# Altium PCB PCB_HidroExtra_v1.0.PcbDoc
Units mil, origin at the board's own origin, x right, y up, seen from the top; angles counter-clockwise.
Board outline 3149.61 x 3937.01 mil, 2 copper layers (Top Layer, Bottom Layer); 85 components, 51 nets, 234 pads, 10 vias.
Unrouted connection lines stored in the file: 1.
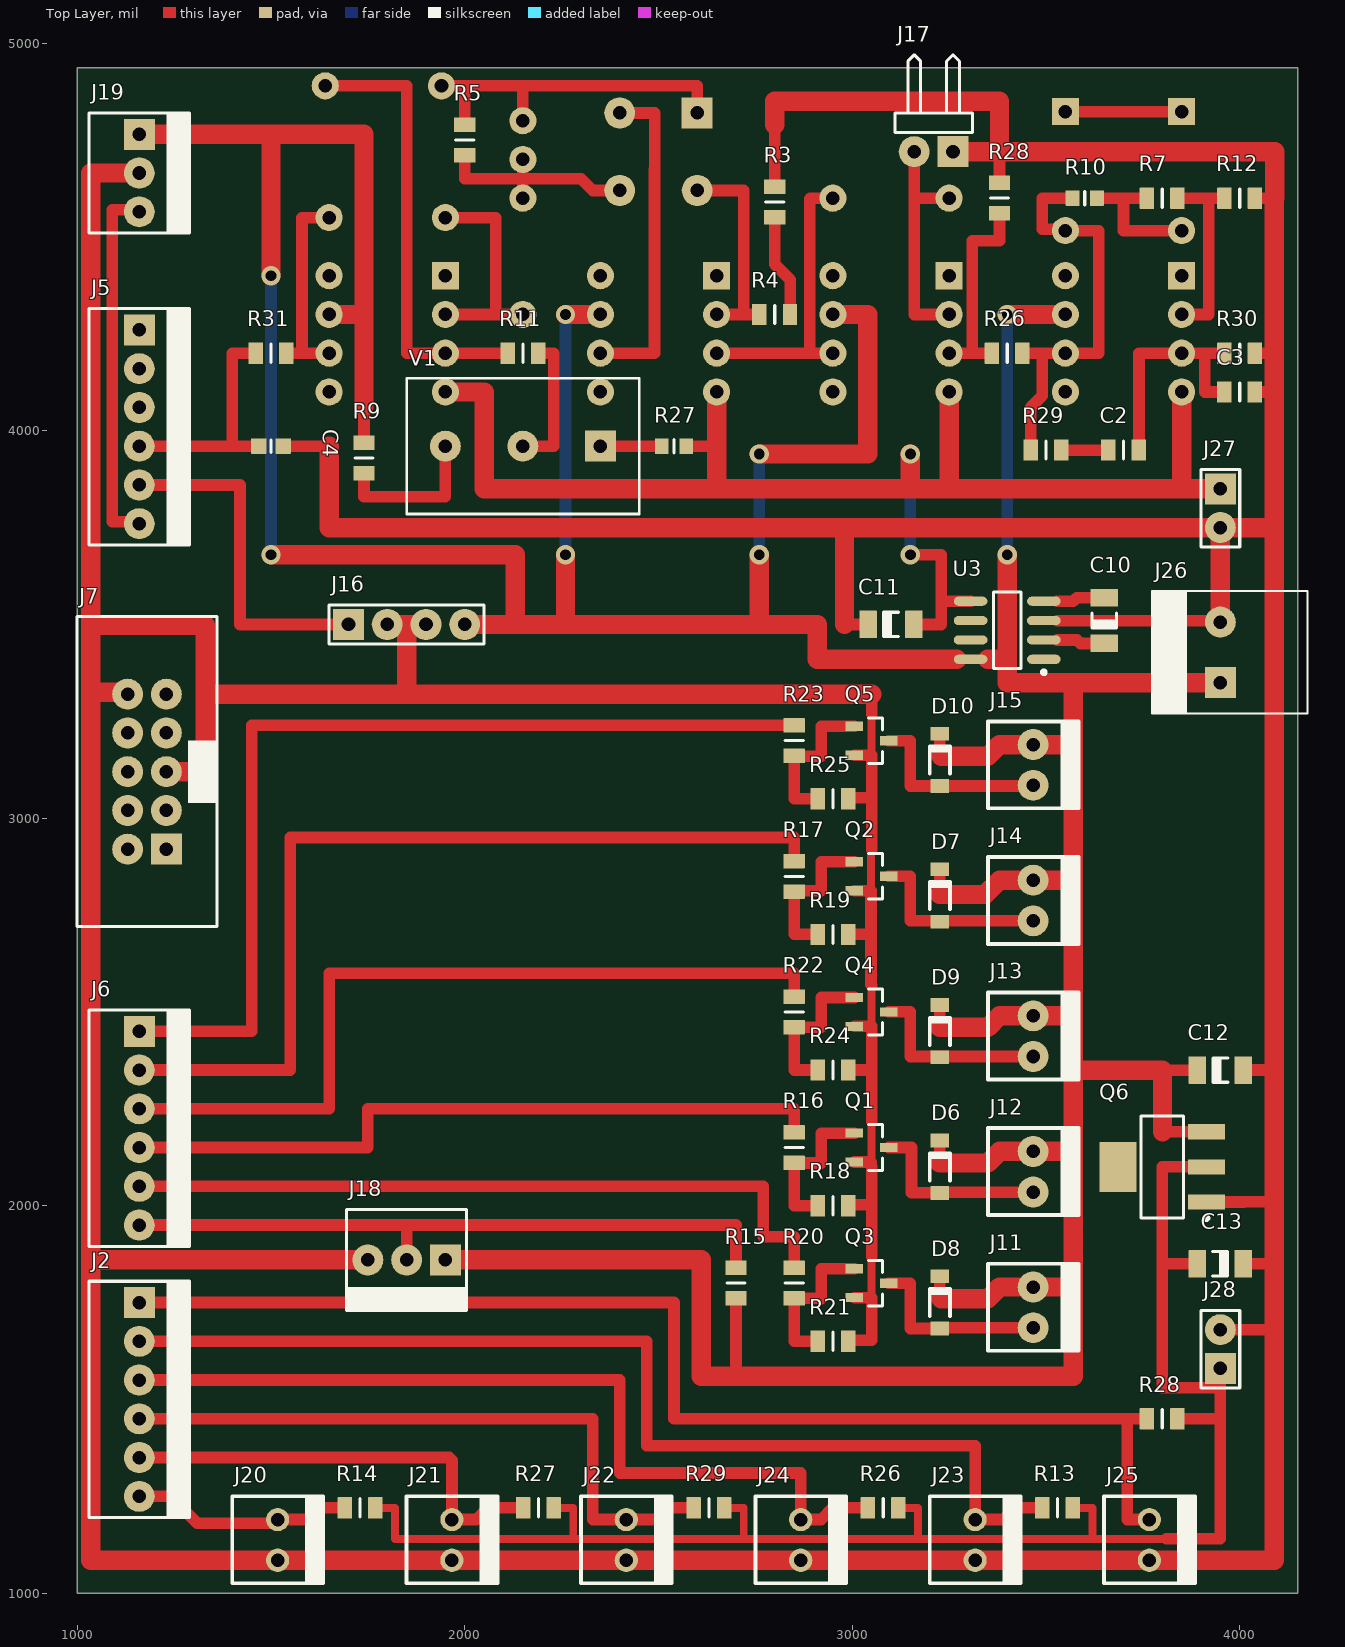
[diagram p0: Top Layer view]
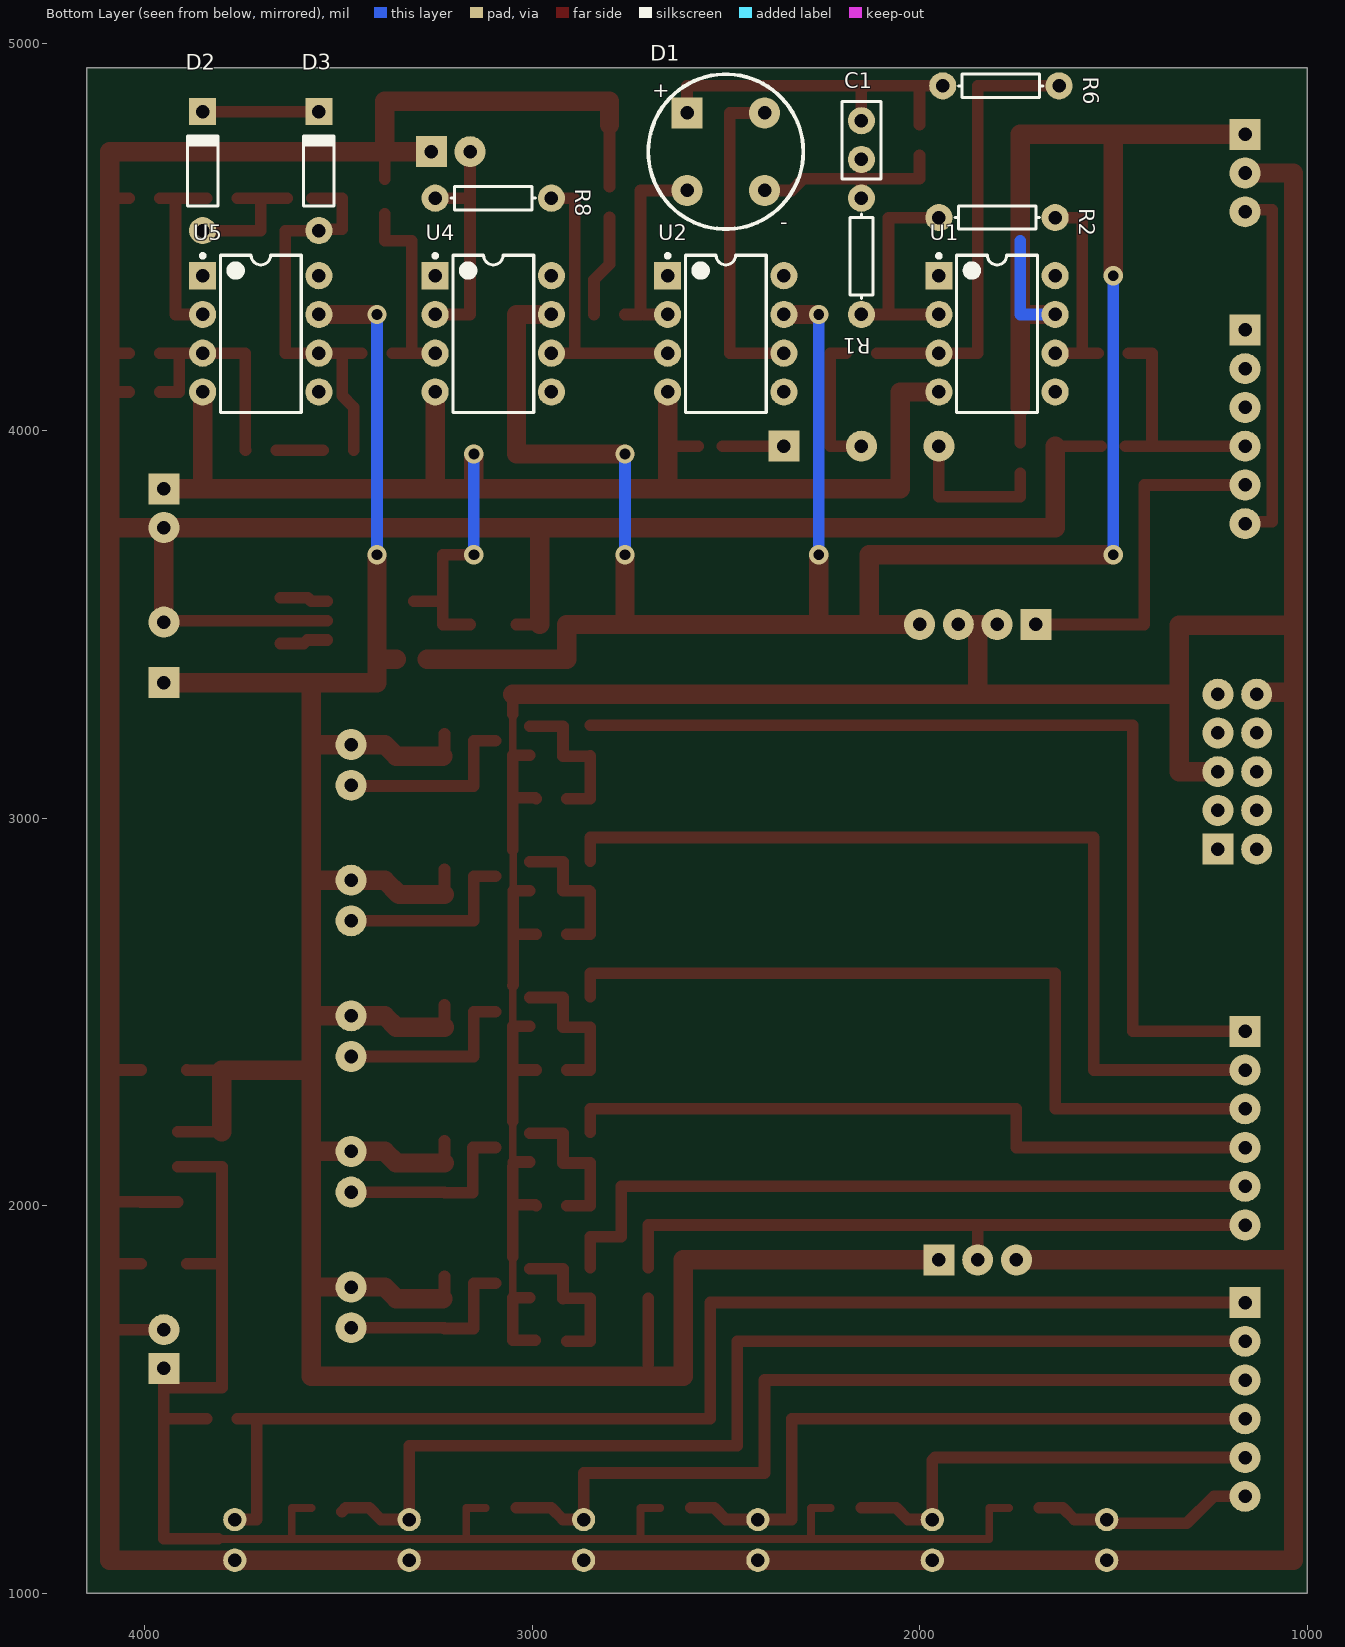
[diagram p1: Bottom Layer view, seen from below]

## Layer stack, top to bottom
Top Solder: solder mask 0.4, Solder Resist, Dk 3.5
Top Layer: signal copper 1.4
Dielectric 1: dielectric 12.6, FR-4, Dk 4.8
Bottom Layer: signal copper 1.4
Bottom Solder: solder mask 0.4, Solder Resist, Dk 3.5

## Board outline
1000,1000 1000,4937.01 4149.61,4937.01 4149.61,1000

## Design rules (kind name [scope] priority, off if disabled: settings)
Clearance [All] p1: gap=10 ignorepadtopadclearanceinfootprint=FALSE except(0: Arc-Hole Track-Hole SMDPad-Hole THPad-Hole Via-Hole Fill-Hole Poly-Hole Region-Hole Text-Hole)
PolygonConnect [All] p1: connectstyle=Relief reliefconductorwidth=10 reliefentries=4 polygonreliefangle="90 Angle" airgapwidth=10
RoutingVias [All] p1: holewidth=28 width=50 viastyle="Through Hole" minholewidth=28 minwidth=50 maxholewidth=28 maxwidth=50
SolderMaskExpansion [All] p1: expansion=4
Width [All] p1: maxlimit=80 minlimit=10 preferedwidth=30
30 further rules are at their usual default settings.

## Classes and differential pairs
component class pump: D6 D7 D8 D9 D10 Q1 Q2 Q3 Q4 Q5 R16 R17 R18 R19 R20 R21 R22 R23 R24 R25
component class connectors: C12 C13 J2 J5 J6 J7 J11 J12 J13 J14 J15 J16 J17 J18 J19 J20 J21 J22 J23 J24 J25 J26 J27 J28 Q6 R13 R14 R15 R26 R27 R28 R29
component class adc: C1 C2 C3 C4 C10 C11 D1 D2 D3 R1 R2 R3 R4 R5 R6 R7 R8 R9 R10 R11 R12 R26 R27 R28 R29 R30 R31 U1 U2 U3 U4 U5 V1

## Components (designator, comment, footprint, x,y, rotation, side; value= is the part's Value field where it differs from the comment)
C1 "Cap" RAD-0.1 2150,4750 r90 bottom value=0.22uF
C2 "10nF" 0805 3700,3950 r180 top
C3 "Cap" 0805 4000,4100 r0 top value=10nF
C4 "Cap" CAPC1608x85N 1500,3960 r0 top value=10uF
C10 "10uF" CAPC3216x130N 3650,3510 r90 top
C11 "10uF" CAPC3216x130N 3100,3500 r0 top
C12 "10uF" CAPC3216x130N 3950,2350 r0 top
C13 "10uF" CAPC3216x130N 3950,1850 r180 top
D1 "Bridge" BRIDGE_W 2500,4720 r180 bottom
D2 "1N4733" DO-35A 3850,4670 r90 bottom
D3 "1N4733" DO-35A 3550,4670 r90 bottom
D6 "" SOD123 3200,2100 r90 top
D7 "" SOD123 3200,2800 r90 top
D8 "" SOD123 3200,1750 r90 top
D9 "" SOD123 3200,2450 r90 top
D10 "" SOD123 3200,3150 r90 top
J2 "Entrada Digitales" MOLEX6 1160,1750 r270 top
J5 "Entradas Analógicas" MOLEX6 1160,4260 r270 top
J6 "Entrdas Digitales" MOLEX6 1160,2450 r270 top
J7 "Conector 5x2" CONN_5x2_BOX 1180,3120 r90 top
J11 "Pump 1" MOLEX2#1 3350,1850 r270 top
J12 "Pump 2" MOLEX2#1 3350,2200 r270 top
J13 "Pump 3" MOLEX2#1 3350,2550 r270 top
J14 "Pump 4" MOLEX2#1 3350,2900 r270 top
J15 "Pump 5" MOLEX2#1 3350,3250 r270 top
J16 "Sensor de PH" HDR1X4 1700,3500 r0 top
J17 "Sonda EC" HDR1X2H 3260,4720 r180 top
J18 "DHT11" MOLEX3 1950,1860 r180 top
J19 "LM35" MOLEX3 1160,4765 r270 top
J20 "Nivel 1" MOLEX2#2 1400,1250 r270 top
J21 "Nivel 1.2" MOLEX2#2 1850,1250 r270 top
J22 "Nivel 2" MOLEX2#2 2300,1250 r270 top
J23 "Nivel 3" MOLEX2#2 3200,1250 r270 top
J24 "Nivel 4" MOLEX2#2 2750,1250 r270 top
J25 "Nivel 5" MOLEX2#2 3650,1250 r270 top
J26 "Fuente" CON_2_156 3950,3350 r90 top
J27 "Fuente -" HDR1X2 3950,3850 r270 top
J28 "Fuente 3.3" HDR1X2 3950,1580 r90 top
Q1 "BSS138" SOT23_N_123 3050,2150 r0 top value="6 Ohm Rdson"
Q2 "BSS138" SOT23_N_123 3050,2850 r0 top value="6 Ohm Rdson"
Q3 "BSS138" SOT23_N_123 3050,1800 r0 top value="6 Ohm Rdson"
Q4 "BSS138" SOT23_N_123 3050,2500 r0 top value="6 Ohm Rdson"
Q5 "BSS138" SOT23_N_123 3050,3200 r0 top value="6 Ohm Rdson"
Q6 "LD1117" SOT223_N 3800,2100 r180 top
R1 "220K" AXIAL-0.3 2150,4450 r270 bottom
R2 "220K" AXIAL-0.3 1800,4550 r180 bottom
R3 "2.2K" 0805 2800,4590 r270 top
R4 "1.0K" 0805 2800,4300 r180 top
R5 "22K" 0805 2000,4750 r270 top
R6 "220K" AXIAL-0.3 1790,4890 r180 bottom
R7 "33K" 0805 3800,4600 r180 top
R8 "6.8K" AXIAL-0.3 3100,4600 r180 bottom
R9 "100K" 0805 1740,3930 r90 top
R10 "56K" 0603 3600,4600 r180 top
R11 "100K" 0805 2150,4200 r180 top
R12 "33K" 0805 4000,4600 r180 top
R13 "10K" 0805 3530,1220 r0 top
R14 "10K" 0805 1730,1220 r0 top
R15 "10K" 0805 2700,1800 r270 top
R16 "100" 0805 2850,2150 r270 top
R17 "100" 0805 2850,2850 r270 top
R18 "10K" 0805 2950,2000 r180 top
R19 "10K" 0805 2950,2700 r180 top
R20 "100" 0805 2850,1800 r270 top
R21 "10K" 0805 2950,1650 r180 top
R22 "100" 0805 2850,2500 r270 top
R23 "100" 0805 2850,3200 r270 top
R24 "10K" 0805 2950,2350 r180 top
R25 "10K" 0805 2950,3050 r180 top
R26 "10K" 0805 3080,1220 r0 top
R26 "100K" 0805 3400,4200 r180 top
R27 "10K" 0805 2190,1220 r0 top
R27 "82K" 0603 2540,3960 r180 top
R28 "10K" 0805 3800,1450 r0 top
R28 "1.0K" 0805 3380,4600 r90 top
R29 "10K" 0805 2630,1220 r0 top
R29 "1.0K" 0805 3500,3950 r180 top
R30 "1.0K" 0805 4000,4200 r0 top
R31 "4.7K" 0805 1500,4200 r0 top
U1 "TL071" DIP-8 1800,4250 r180 bottom
U2 "TL071" DIP-8 2500,4250 r180 bottom
U3 "ICL7660" SO8_N 3400,3485 r180 top
U4 "TL071" DIP-8 3100,4250 r180 bottom
U5 "TL071" DIP-8 3700,4250 r180 bottom
V1 "22K" TB-3x200 2150,3960 r0 top

## Footprints (in the part's own frame and the unit in brackets; to place one, negate y for a bottom-side part, rotate by r counter-clockwise, add the part's x,y. Pads: shape width x height; smd on the part's side, far side on the other; paste and mask are expansions set on the pad)
0603 [mm]
  rrect5% 0.9x1 smd mask+0.051: 1(-0.8,0) 2(0.8,0)
  silkscreen extent 0,-0.45 0,0.45, body extent -0.85,-0.48 0.85,0.48, height 0.25
0805 [mm]
  rrect5% 0.95x1.4 smd: 1(-1,0) 2(1,0)
  silkscreen extent 0,-0.6 0,0.6, body extent -1.07,-0.7 1.07,0.7, height 0.6
AXIAL-0.3 [mil] "Axial Device, Thru-Hole; 2 Leads; 0.3 in Pin Spacing"
  round 70 hole 35: 1(-150,0) 2(150,0)
  silkscreen extent -109,-30 109,30
BRIDGE_W [mil] "Bridge Rectifier; 4 Terminals; Body 10 mm; Pitch 5.08 mm"
  rect 80x80 hole 35: 1(-100,100)
  round 80 hole 35: 2(-100,-100) 3(100,-100) 4(100,100)
  silkscreen extent -200,-200 200,200, body extent -200,-200 200,200, height 100
CAPC1608x85N [mm] "Chip Capacitor, Body 1.6x0.8mm, IPC Medium Density"
  rrect5% 1x1 smd: 1(-0.8,0) 2(0.8,0)
  silkscreen extent 0,-0.4 0,0.4, body extent -0.87,-0.48 0.87,0.48, height 0.85
CAPC3216x130N [mm] "Chip Capacitor, Body 3.2x1.6mm, IPC Medium Density"
  rrect5% 1.15x1.8 smd: 1(-1.5,0) 2(1.5,0)
  silkscreen extent -0.48,-0.8 0.5,0.8, body extent -1.7,-0.9 1.7,0.9, height 1.3
CON_2_156 [mil] "Connector, 0.156\", 2 vias"
  rect 80x80 hole 35: 1(0,0)
  round 80 hole 35: 2(156,0)
  silkscreen extent -80,-225 236,177
CONN_5x2_BOX [mil] "Connector; IDC, Straight Press-in Pin, Thru-Hole; 10 Position; Vertical; Pitch 2.54 mm; Body 20.32 x 9.2 x 9.45 mm (LxWxH)"
  rect 80x80 hole 35: 1(-200,-50)
  round 80 hole 35: 2(-200,50) 3(-100,-50) 4(-100,50) 5(0,-50) 6(0,50) 7(100,-50) 8(100,50) 9(200,-50) 10(200,50)
  silkscreen extent -400,-181 400,181
DIP-8 [mil] "DIP; 8 Leads; Row Spacing 7.62 mm; Pitch 2.54 mm"
  rect 70x70 hole 35: 1(-150,150)
  round 70 hole 35: 2(-150,50) 3(-150,-50) 4(-150,-150) 5(150,-150) 6(150,-50) 7(150,50) 8(150,150)
  silkscreen extent -155,-203 104,206, body extent -142,-203 142,203, height 200
DO-35A [mil] "Diode, Axial; Body 4.6 x 1.9 mm (LxDia. max), Lead Dia. 0.53 mm (max)"
  round 70 hole 35: 1(-153.54,0)
  rect 70x70 hole 35: 2(153.54,0)
  silkscreen extent -91,-39 94,39
HDR1X2 [mil] "Connector; Header; 2 Position"
  rect 80x80 hole 35: 1(0,0)
  round 80 hole 35: 2(100,0)
  silkscreen extent -50,-50 150,50
HDR1X2H [mil] "Connector; Header; 2 Position; Right Angle"
  rect 80x80 hole 35: 1(0,0)
  round 80 hole 35: 2(100,0)
  silkscreen extent -50,-250 150,-50
HDR1X4 [mil] "Connector; Header; 4 Position"
  rect 80x80 hole 35: 1(0,0)
  round 80 hole 35: 2(100,0) 3(200,0) 4(300,0)
  silkscreen extent -50,-50 350,50
MOLEX2#1 [mil]
  round 80 hole 35: 1(60,117) 2(165,117)
  silkscreen extent 0,0 224,234, body extent 0,0 226,236, height 465
MOLEX2#2 [mil]
  round 60 hole 35: 1(60,117) 2(165,117)
  silkscreen extent 0,0 224,234, body extent 0,0 226,236, height 465
MOLEX3 [mil]
  rect 80x80 hole 35: 1(0,0)
  round 80 hole 35: 2(100,0) 3(200,0)
  silkscreen extent -55,-130 255,130, body extent -50,-125 250,125, height 423
MOLEX6 [mil]
  rect 80x80 hole 35: 1(0,0)
  round 80 hole 35: 2(100,0) 3(200,0) 4(300,0) 5(400,0) 6(500,0)
  silkscreen extent -55,-130 555,130
RAD-0.1 [mil] "Radial Cap, Thru-Hole; 2 Leads; 0.1 in Pin Spacing"
  round 70 hole 35: 1(-50,0) 2(50,0)
  silkscreen extent -100,-50 100,50
SO8_N [mm] "SOIC, 8-Leads, Body 4.9x3.9mm, Pitch 1.27mm, IPC Medium Density"
  oval 2.2x0.6 smd: 1(-2.4,1.905) 2(-2.4,0.635) 3(-2.4,-0.635) 4(-2.4,-1.905) 5(2.4,-1.905) 6(2.4,-0.635) 7(2.4,0.635) 8(2.4,1.905)
  silkscreen extent -2.53,-2.5 0.9,2.88, body extent -2,-2.5 2,2.5, height 1.75
SOD123 [mil]
  rect 35.43x47.24 smd: 1(-67,-26) 2(68,-26)
  silkscreen extent -35,-52 35,0, body extent -73,-57 73,6, height 50
SOT23_N_123 [mm] "SOT23, 3-Leads, Body 2.9x1.3mm, Pitch 0.95mm, Lead Span 2.3mm - Reverse Pinning, IPC Medium Density"
  rect 1.15x0.6 smd: 1(-1.125,0.95) 2(-1.125,-0.95) 3(1.125,0)
  silkscreen extent -0.2,-1.5 0.7,1.5, body extent -0.7,-1.5 0.7,1.5, height 1.1
SOT223_N [mm] "SOT223, 4-Leads, Body 6.5x3.5mm, Pitch 2.3mm, Lead Span 7mm, IPC Medium Density"
  rect 2.4x1 smd: 1(-2.9,2.3) 2(-2.9,0) 3(-2.9,-2.3)
  rect 2.4x3.3 smd: 4(2.9,0)
  silkscreen extent -3.03,-3.35 1.4,3.47, body extent -1.85,-3.35 1.85,3.35, height 1.7
TB-3x200 [mil] "Terminal block, 3 positions, 200 mils"
  rect 80x80 hole 35: 1(200,0)
  round 80 hole 35: 2(0,0) 3(-200,0)
  silkscreen extent -300,-175 300,175

## Part data
C1 C4: Package=0603, Tolerance=±10%, Voltage-Rated=50V
C2: library part Cap, "Cap", Package=0805, Tolerance=±10%, Voltage-Rated=50V
C3: Package=0805, Tolerance=±10%, Voltage-Rated=50V
C10 C11: library part "Cap Pol", "Cap", Current="90 mARMS", Manufacturer=Panasonic, MfgPartNum=EEE-FC1H220P, Package="8mm dia.", Tolerance=±10%, Voltage-Rated=50V, 3rdMfgr="Vishay / MAL214097103E3"
C12 C13: library part Cap, "Cap", Package=0603, Tolerance=±10%, Voltage-Rated=6.3V
D1: "Full Wave Diode Bridge", DatasheetVersion=E2732B, LatestRevisionDate=29-May-2009, LatestRevisionNote="Sch pins A & K swapped.", PackageDescription="Bridge Rectifier; 4 Terminals; Body 9.4 x 9.4 mm (typ); Pitch 5.08 mm", PackageReference=D-38, Published=8-Jun-2000, Publisher="Altium Limited"
D2 D3: library part "D Zener", "Zener Diode 3.3v", LatestRevisionDate=17-Jul-2002, LatestRevisionNote="Re-released for DXP Platform.", PackageDescription="Diode, Thru-Hole; 2 Leads; 0.7 in Pin Spacing", PackageReference=DIODE-0.7, Published=8-Jun-2000, Publisher="Altium Limited"
D6 D7 D8 D9 D10: library part MBRX160, "SOD123"
J2 J5 J6: library part MOLEX6
J11 J12 J13 J14 J15 J20 J21 J22 J23 J24 J25 J26: library part "Header 2", "Header, 2-Pin", LatestRevisionDate=17-Jul-2002, LatestRevisionNote="Re-released for DXP Platform.", Publisher="Altium Limited"
J16: library part "Header 4", LatestRevisionDate=17-Jul-2002, LatestRevisionNote="Re-released for DXP Platform.", Publisher="Altium Limited"
J17: library part "Header 2H", "Header, 2-Pin, Right Angle", LatestRevisionDate=17-Jul-2002, LatestRevisionNote="Re-released for DXP Platform.", Publisher="Altium Limited"
J18 J19: library part MOLEX3
J27 J28: library part "Header 2", LatestRevisionDate=17-Jul-2002, LatestRevisionNote="Re-released for DXP Platform.", Publisher="Altium Limited"
Q1 Q2 Q3 Q4 Q5: "N-Channel MOSFET", Manufacturer=Fairchild, Package=SOT23, Voltage-Rated=50V
Q6: "Voltage Reg., Low Drop", PackageDescription="3-Pin Transistor Outline Package 2.54 mm Pitch, 15.1 mm Lead Span", PackageReference=SOT-223
R1 R2 R3 R4 R5 R6 R7 R8 R9 R10 R11 R12 R13 R14 R15 R16 R17 R18 R19 R20 R21 R22 R23 R24 R25 R26 R26 R27 R27 R28 R28 R29 R29 R30 R31: library part Res, "Resistor", Package=0603, Tolerance=1%
U1 U2 U4 U5: "Low-noise jfet-input operational amplifiers"
U3: "CMOS Voltage Converters, from positive to negative for an input range of +1.5V to +10.0V"
V1: library part Preset, "Potentiometer", LatestRevisionDate=17-Jul-2002, LatestRevisionNote="Re-released for DXP Platform.", PackageDescription="Variable Resistor, Thru-Hole; 3 Leads", PackageReference=VR5, Published=8-Jun-2000, Publisher="Altium Limited", Set Position=0.5, Sim Note="Enter the Resistance value and the set point into parameter fields."

## Via types
v1: diameter 50, hole 28, Top Layer to Bottom Layer, 10 vias

## Nets (pads, with @x,y where several pads share a name; then routed paths per layer and width w, separated by ;. In a path a pad name is that pad's centre, name@x,y a point inside that pad or via, vN(x,y) a via of type N, cw(c..) or ccw(c..) an arc to the next point about the centre after c; other vN are vias at no path point)
+3.3v: C13.2 J28.1 Q6.2 R13.2 R14.2 R26.2@3119.37,1220 R27.2@2229.37,1220 R28.2@3839.37,1450 R29.2@2669.37,1220 | length 4238.9
  Top Layer w20: R14.2 1820,1220 1820,1140 3170,1140 ; R27.2@2229.37,1220 2280,1220 2280,1150 ; R29.2@2669.37,1220 2720,1220 2720,1150 ; R26.2@3119.37,1220 3170,1220 3170,1140 ; R13.2 3620,1220 3620,1140 ; 3810,1140 3620,1140 ; 3170,1140 3620,1140
  Top Layer w30: 3810,1140 3950,1140 3950,1450 ; R28.2@3839.37,1450 3950,1450 ; C13.2 3800,1850 ; Q6.2 3800,2100 3800,1850 ; J28.1 3950,1530 ; 3800,1850 3800,1530 3950,1530 ; 3950,1450 3950,1530
+5v: C12.1 D6.2 D7.2 D8.2 D9.2 D10.2 J11.1 J12.1 J13.1 J14.1 J15.1 J16.4 J18.1 J19.1 J26.1 Q6.3 R9.2 R15.2 U1.7 U2.7 U3.8 U4.7 U5.7 | length 15305.2
  Top Layer w30: R9.2 1740,4040 1740,4060 ; 2260,3510 2270,3500 ; 2700,1590 R15.2 ; D8.2 3226,1764 3230,1760 ; 3226,2110 D6.2 ; 3226,2460 D9.2 ; 3226,2803 D7.2 ; 3226,3164 D10.2 ; 3570,2350 3570.55,2349.45 ; 3800.55,2190.55 Q6.3 ; 3800.55,2349.45 3890.39,2349.45 C12.1
  Top Layer w50: J19.1 1500,4765 ; v1(1500,3680) 2130,3680 2130,3500 ; v1(1500,4400) 1500,4765 ; U1.7 1740,4300 ; 1740,4060 1740,4300 ; J18.1 2610,1860 2610,1560 3570,1560 3570,1790 ; J16.4 2130,3500 ; 2260,3510 v1(2260,3680) ; v1(2260,4300) U2.7 ; v1(2760,3680) 2760,3500 ; v1(2760,3940) 3040,3940 3040,4300 U4.7 ; 3226,2110 3350,2110 3380,2140 J12.1 3570,2140 ; 3226,2460 3350,2460 3380,2490 J13.1 3570,2490 ; 3226,2803 3343,2803 3380,2840 J14.1 3570,2840 ; 3230,1760 3350,1760 3380,1790 J11.1 3570,1790 ; 3230,3160 3350,3160 3380,3190 J15.1 3570,3190 ; U3.8@3270,3410 2910,3410 2910,3500 2760,3500 ; 3350,3410 3390,3410 3400,3400 3400,3350 3570,3350 ; 3400,3410 v1(3400,3680) ; v1(3400,4300) U5.7 ; 3570.55,2349.45 3800.55,2349.45 3800.55,2190.55 ; J26.1 3570,3350 ; 1500,4765 1740,4765 1740,4300 ; 2130,3500 2270,3500 2760,3500 ; 3570,1790 3570,2140 ; 3570,2140 3570,2350 3570,2490 ; 3570,2490 3570,2840 ; 3570,2840 3570,3190 ; 3570,3190 3570,3350
  Bottom Layer w30: v1(1500,3680) v1(1500,4400) ; U1.7 1740,4300 1740,4490 ; v1(2260,3680) v1(2260,4300) ; v1(2760,3680) v1(2760,3940) ; v1(3400,3680) v1(3400,4300)
-5v: C11.2 J27.1 R27.1@2571.5,3960 U1.4 U2.4 U3.5 U4.4 U5.4 | length 3821.2
  Top Layer w30: R27.1@2571.5,3960 2650,3960 ; v1(3150,3680) 3230,3680 3230,3560 ; C11.2 3230,3500 3230,3560 ; U3.5 3230,3560 ; U5.4@3835,4100 U5.4@3850,4085
  Top Layer w50: U1.4@1960,4100 2050,4100 2050,3850 2650,3850 ; U2.4 2650,3960 2650,3850 ; v1(3150,3940) 3150,3850 ; U4.4 3250,3850 ; U5.4@3850,4085 3850,3850 ; J27.1@3940,3850 3850,3850 ; 2650,3850 3040,3850 3150,3850 ; 3150,3850 3250,3850 ; 3250,3850 3730,3850 3850,3850
  Bottom Layer w30: v1(3150,3680) v1(3150,3940)
GND: C3.2 C4.2 C11.1 C12.2 C13.1 J7.5 J7.10 J16.2 J16.3 J17.1 J18.3 J19.2 J20.2 J21.2 J22.2 J23.2 J24.2 J25.2 J26.2 J27.2 J28.2 Q1.2 Q2.2 Q3.2 Q4.2 Q5.2 Q6.1 R3.1 R12.1 R18.1 R19.1 R21.1 R24.1 R25.1 R28.2@3380,4639.37 R30.2 U3.3 | length 22559.5
  Top Layer w20: 3047.4,1762.6 3048.35,1763.54 ; 3047.4,2112.6 3048.35,2113.54 ; 3048.35,2812.6 3048.35,2916.69 3050,2918.35 ; 3050,1763.54 3050,1868.35 ; 3050,2113.54 3050,2218.35 ; 3050,2462.6 3050,2568.35 ; 3050,3162.6 3050,3268.35
  Top Layer w30: J7.10@1125,3325 J7.10 ; C4.2 1650,3960 ; R3.1 2800,4790 ; 2980,3500 C11.1 ; R18.1 2991.97,2002.6 3047.4,2002.6 3048.35,2001.65 ; R24.1 3048.35,2350 ; R19.1 3040,2700 ; R25.1 2991.97,3052.6 3047.4,3052.6 ; R21.1@2991.97,1652.6 3047.4,1652.6 ; Q3.2 3047.4,1762.6 ; Q1.2 3047.4,2112.6 3048.35,2111.65 ; Q4.2 3048.35,2462.6 ; Q2.2 3048.35,2812.6 3048.35,2570 3050,2568.35 ; Q5.2 3048.35,3162.6 ; 3050,1652.6 3050,1762.6 ; 3050,1868.35 3050,2100 ; 3050,2218.35 3050,2462.6 ; 3050,2918.35 3050,3162.6 ; 3050,3268.35 3050,3320 ; R28.2@3380,4649.37 3380,4720 3430,4720 3450,4720 ; U3.3@3528.98,3510 J26.2@3936,3510 ; Q6.1 4010,2009.45 4010.55,2010 4089.37,2010 ; J28.2 4089.37,1680 ; C13.1 4089.37,1850 ; C12.2 4089.37,2350 ; C3.2 4089.37,4100 ; R30.2 4089.37,4200 ; R12.1 4089.37,4600
  Top Layer w50: J7.10@1125,3325 1035,3325 ; J19.2 1035,4665 1035,3500 ; J7.5 1330,3120 1330,3320 ; 1650,3960 1650,3750 2980,3750 ; J18.3 1035,1860 ; J16.2 1850,3500 ; 1850,3350 1850,3500 ; J16.3 1850,3500 ; 2800,4790 2800,4850 3380,4850 3380,4720 ; 2980,3500 2980,3750 ; 3050,3320 1330,3320 ; J17.1 3380,4720 ; 3430,4720 4090,4720 4090,4600 ; 3450,4720 3380,4720 ; J26.2 J27.2 ; 4089.37,4600 4089.37,4200 4089.37,4100 4089.37,3750 ; 1035,1860 1035,1085 J20.2 J21.2 J22.2 J24.2 J23.2 J25.2 4089.37,1085 4089.37,1680 4089.37,1850 4089.37,2010 4089.37,2350 4089.37,3750 ; 1035,1860 1035,3325 ; 1035,3325 1035,3500 ; 1035,3500 1036.65,3498.35 1330,3498.35 ; 1330,3320 1330,3498.35 ; 1330,3320 1330,3498.35 ; 2980,3750 J27.2 ; J27.2 4089.37,3750
NetC1_1: C1.1 D1.3 R1.1 R5.2 | length 573.1
  Top Layer w30: R5.2 2000,4650 2150,4650 ; R1.1 2150,4650 ; C1.1 2150,4650 ; D1.3 2330,4620 2300,4650 2150,4650
NetC1_2: C1.2 D1.1 R5.1 R6.1 | length 928.9
  Top Layer w30: R6.1 1990,4890 ; R5.1 2000,4880 1990,4890 ; C1.2 2150,4880 2140,4890 ; D1.1 2600,4890 2140,4890 ; 1990,4890 2140,4890
NetC2_1: C2.1 C3.1 R30.1 U5.3 | length 621.5
  Top Layer w30: C2.1 3740,3950.63 3740,4200 U5.3 3910,4200 ; C3.1 3910,4100 3910,4200 ; R30.1 3910,4200
NetC2_2: C2.2 R29.1@3539.37,3950 | length 121.3
  Top Layer w30: R29.1@3539.37,3950 C2.2
NetC4_1: C4.1 J5.4 R31.1 | length 611.3
  Top Layer w30: J5.4@1160,3965 1165,3960 1400,3960 ; R31.1 1400.32,4200.31 1400,4200 1400,3960 ; C4.1 1400,3960
NetC10_1: C10.1 U3.2 | length 124.8
  Top Layer w30: U3.2@3528.98,3460 3580,3460 3589.06,3450.94 C10.1
NetC10_2: C10.2 U3.4 | length 124.8
  Top Layer w30: U3.4@3528.98,3560 3570,3560 3579.06,3569.06 C10.2
NetD1_2: D1.2 R4.2 U2.2 | length 540.6
  Top Layer w30: D1.2 2720,4620 2720,4300 R4.2 ; U2.2 2710,4300
NetD1_4: D1.4 U2.6 | length 849.7
  Top Layer w30: U2.6 2489.57,4200 2489.57,4675.03 2490,4675.47 2490,4820 D1.4
NetD2_1: D2.1 R7.2 R10.1 | length 362.7
  Top Layer w30: R10.1 3700,4600 ; R7.2 3700,4600 ; D2.1 3700,4516.46 3700,4600
NetD2_2: D2.2 D3.2 | length 300
  Top Layer w30: D3.2 D2.2
NetD3_1: D3.1 R10.2 R26.1@3439.37,4200 R29.2@3460.63,3950 U5.6 | length 1050.7
  Top Layer w30: R26.1@3439.37,4200 3490,4200 ; R29.2@3460.63,3950 3460.63,4060.63 3490,4090 3490,4200 ; U5.6@3535,4200 3490,4200 ; D3.1@3535,4520 3490,4520 3490,4600 R10.2 ; U5.6 3636.46,4200 3636.46,4516.46 D3.1
NetD6_1: D6.1 J12.2 Q1.3 | length 489.7
  Top Layer w30: Q1.3 3153,2150 3153,2033 D6.1 ; D6.1@3226,2035 J12.2
NetD7_1: D7.1 J14.2 Q2.3 | length 487.7
  Top Layer w30: Q2.3 3150,2850 3150,2735 J14.2
NetD8_1: D8.1 J11.2 Q3.3 | length 489.7
  Top Layer w30: Q3.3 3150,1800 3150,1683 D8.1 ; D8.1@3226,1685 J11.2
NetD9_1: D9.1 J13.2 Q4.3 | length 487.7
  Top Layer w30: Q4.3 3150,2500 3150,2385 J13.2
NetD10_1: D10.1 J15.2 Q5.3 | length 490.5
  Top Layer w30: Q5.3 3150,3200 3150,3083 D10.1 3465,3083 J15.2
NetJ2_1: J2.1 J25.1 R28.1@3760.63,1450 | length 3217.6
  Top Layer w30: J2.1 2540,1750 2540,1450 3710,1450 ; R28.1@3760.63,1450 3710,1450 ; J25.1 3710,1190 3710,1450
NetJ2_2: J2.2 J23.1 R13.1 | length 2807.2
  Top Layer w30: J2.2 2470,1650 2470,1380 3317,1380 J23.1 3390,1190 3420,1220 3480.63,1220 R13.1@3490.63,1210
NetJ2_3: J2.3 J24.1 R26.1@3040.63,1220 | length 2253.1
  Top Layer w30: J2.3 2400,1550 2400,1310 2867,1310 J24.1 2920,1190 2950,1220 R26.1@3040.63,1220
NetJ2_4: J2.4 J22.1 R29.1@2590.63,1220 | length 1703.1
  Top Layer w30: J2.4 2330,1450 2330,1190 J22.1 2500,1190 2530,1220 R29.1@2590.63,1220
NetJ2_5: J2.5 J21.1 R27.1@2150.63,1220 | length 1159
  Top Layer w30: J2.5 1960,1350 1967,1343 J21.1 2030,1190 2060,1220 R27.1@2150.63,1220
NetJ2_6: J2.6 J20.1 R14.1 | length 576.2
  Top Layer w30: J2.6 1240,1250 1310,1180 1517,1180 1527,1190 1600,1190 1630,1220 R14.1
NetJ5_5: J5.5 J16.1 | length 900
  Top Layer w30: J5.5 1420,3860 1420,3500 J16.1
NetJ5_6: J5.6 J19.3 | length 945
  Top Layer w30: J5.6@1160,3765 1090,3765 1090,4570 J19.3@1160,4570
NetJ6_1: J6.1 R23.1 | length 2480.9
  Top Layer w30: J6.1 1450,2450 1450,3239.37 ; 1450.63,3239.37 1450,3240 1450,3239.37 ; R23.1 1450,3239.37
NetJ6_2: J6.2 R17.1 | length 2350.6
  Top Layer w30: J6.2 1550,2350 1550,2950 2850,2950 R17.1
NetJ6_3: J6.3 R22.1 | length 2100.6
  Top Layer w30: J6.3 1650,2250 1650,2600 2850,2600 R22.1
NetJ6_4: J6.4 R16.1 | length 1850.6
  Top Layer w30: J6.4 1750,2150 1750,2250 2850,2250 R16.1
NetJ6_5: J6.5 R20.1 | length 1900.6
  Top Layer w30: J6.5 2770,2050 2770,1920 2850,1920 R20.1
NetJ6_6: J6.6 J18.2 R15.1 | length 1740.6
  Top Layer w30: J6.6 1850,1950 ; J18.2 1850,1950 ; R15.1 2700,1950 2360,1950 1850,1950
NetJ17_2: J17.2 R8.1 U4.2 | length 568.3
  Top Layer w30: J17.2@3150,4720 3160,4710 3160,4300 U4.2@3220,4300 ; 3170,4600 3240,4600 R8.1@3250,4610
NetQ1_1: Q1.1 R16.2 R18.2 | length 404.6
  Top Layer w30: R18.2 2850,2000 R16.2 2850.63,2110 2920,2110 2920,2187.4 Q1.1
NetQ2_1: Q2.1 R17.2 R19.2 | length 402.6
  Top Layer w30: R19.2 2850,2700 R17.2 2851.97,2812.6 2920,2812.6 2920,2887.4 Q2.1
NetQ3_1: Q3.1 R20.2 R21.2 | length 404.6
  Top Layer w30: R21.2 2850,1650 R20.2 2919.37,1760.63 2920,1760 2920,1837.4 Q3.1
NetQ4_1: Q4.1 R22.2 R24.2 | length 404.6
  Top Layer w30: R24.2 2850,2350 R22.2 2919.37,2460.63 2920,2460 2920,2537.4 Q4.1
NetQ5_1: Q5.1 R23.2 R25.2 | length 404.6
  Top Layer w30: R25.2 2850,3050 R23.2 2850.63,3160 2920,3160 2920,3237.4 Q5.1
NetR1_2: R1.2 R2.1 U1.2 | length 570
  Top Layer w30: U1.2 2080,4300 ; R2.1 2080,4550 2080,4300 ; R1.2@2140,4300 2080,4300
NetR2_2: R2.2 R31.2 U1.6 | length 600.6
  Top Layer w30: R31.2 1580,4200 ; R2.2 1580,4550 1580,4200 ; 1580,4200 U1.6 1580,4200
NetR3_2: R3.2 R4.1 | length 267.2
  Top Layer w30: R3.2 2800,4430 2840,4390 R4.1@2840,4300
NetR6_2: R6.2 R11.2 U1.3 | length 1225.4
  Top Layer w30: R6.2@1640,4880 1650,4890 1850,4890 1850,4200 2010.63,4200 ; U1.3 R11.2
NetR7_1: R7.1 R12.2 U5.2 | length 506.3
  Top Layer w30: U5.2@3835,4300 U5.2 3920,4300 3920,4600 ; R7.1 3920,4600 ; R12.2 3920,4600
NetR8_2: R8.2 U2.3 U4.6 | length 729
  Top Layer w30: U2.3 2890,4200 ; R8.2@2920,4600 2891.7,4600 2890,4598.3 2890,4200 ; U4.6 2890,4200
NetR9_1: R9.1 V1.3 | length 400.6
  Top Layer w30: R9.1 1740,3830 1950,3830 V1.3
NetR11_1: R11.1 V1.2 | length 388.9
  Top Layer w30: V1.2@2130,3960 V1.2@2150,3980 ; V1.2 2230,3960 2230,4200 R11.1
NetR26_2: R26.2@3360.63,4200 R28.1@3380,4560.63 U4.3 | length 530.6
  Top Layer w30: U4.3@3260,4200 R26.2@3360.63,4200 ; 3310,4200 3310,4490 3380,4490 R28.1@3380,4560
NetR27_2: R27.2@2508.5,3960 V1.1 | length 158.5
  Top Layer w30: V1.1 R27.2@2508.5,3960
pads on no net: J5.1 J5.2 J5.3 J7.1 J7.2 J7.3 J7.4 J7.6 J7.7 J7.8 J7.9 Q6.4 U1.1 U1.5 U1.8 U2.1 U2.5 U2.8 U3.1 U3.6 U3.7 U4.1 U4.5 U4.8 U5.1 U5.5 U5.8

## Silkscreen, mask and mechanical layers (free items; w line width, h text height)
Mechanical 1:
  the board outline again, w10

## Text inside footprints (layer, text, board x,y; h text height)
D1: Bottom Overlay "-" at 2360,4520 h40; Bottom Overlay "+" at 2690,4860 h40